# EAGLE board TeensyBalanceBoardWorking (EAGLE 7.7.0)
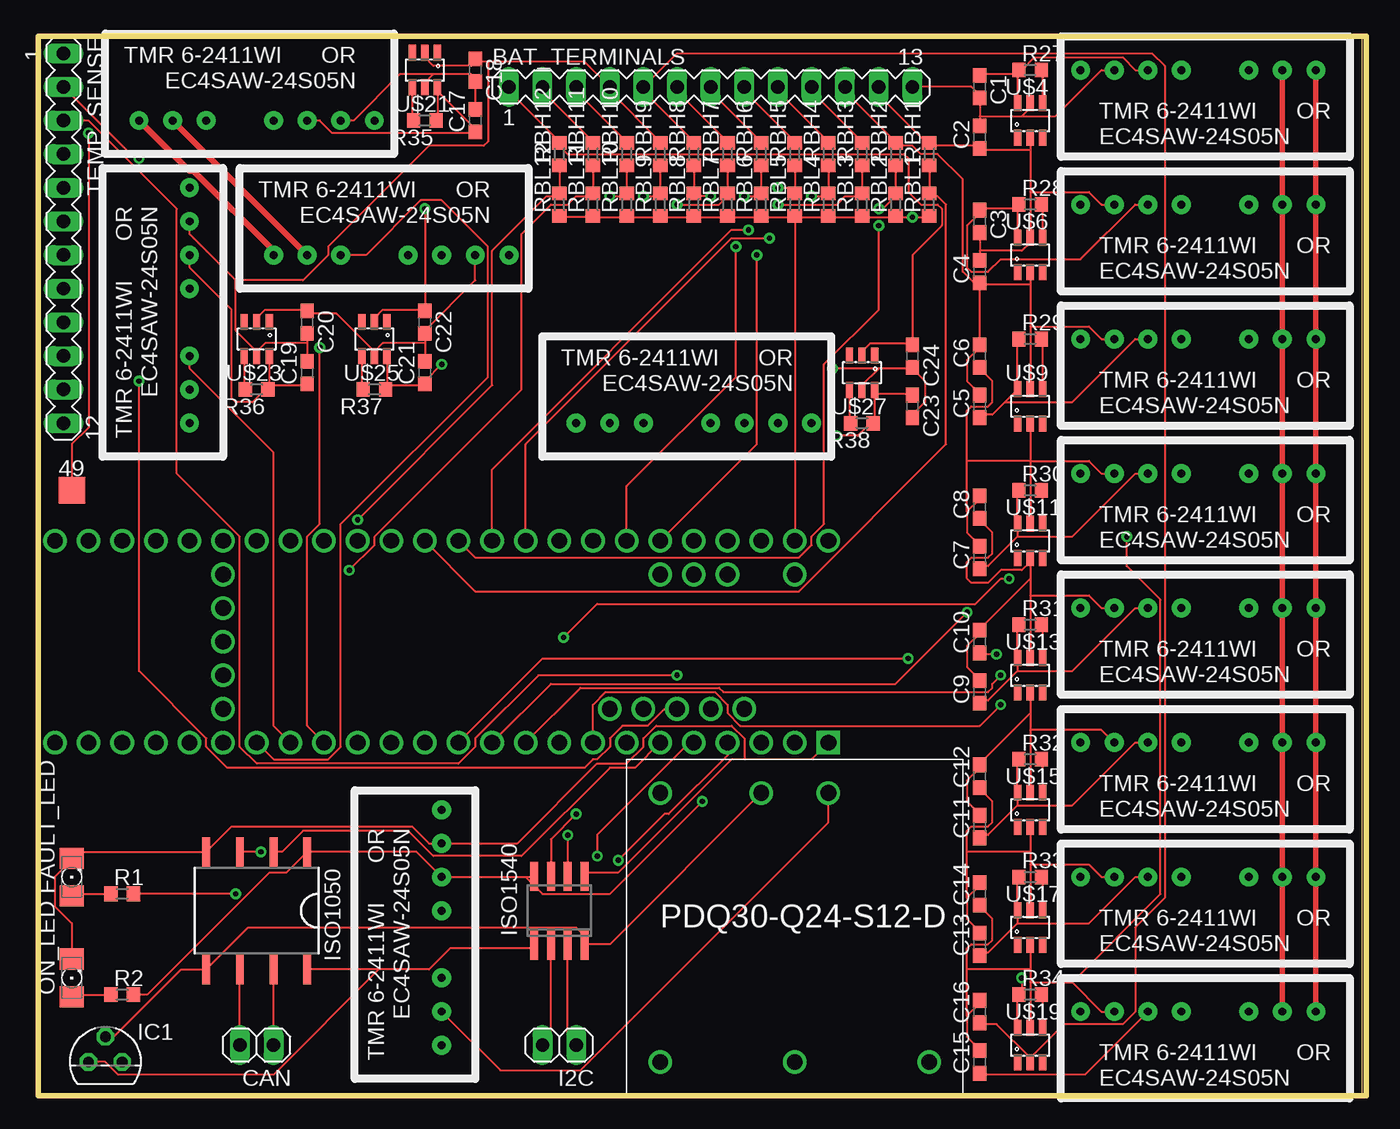
[diagram p0: board, top side]
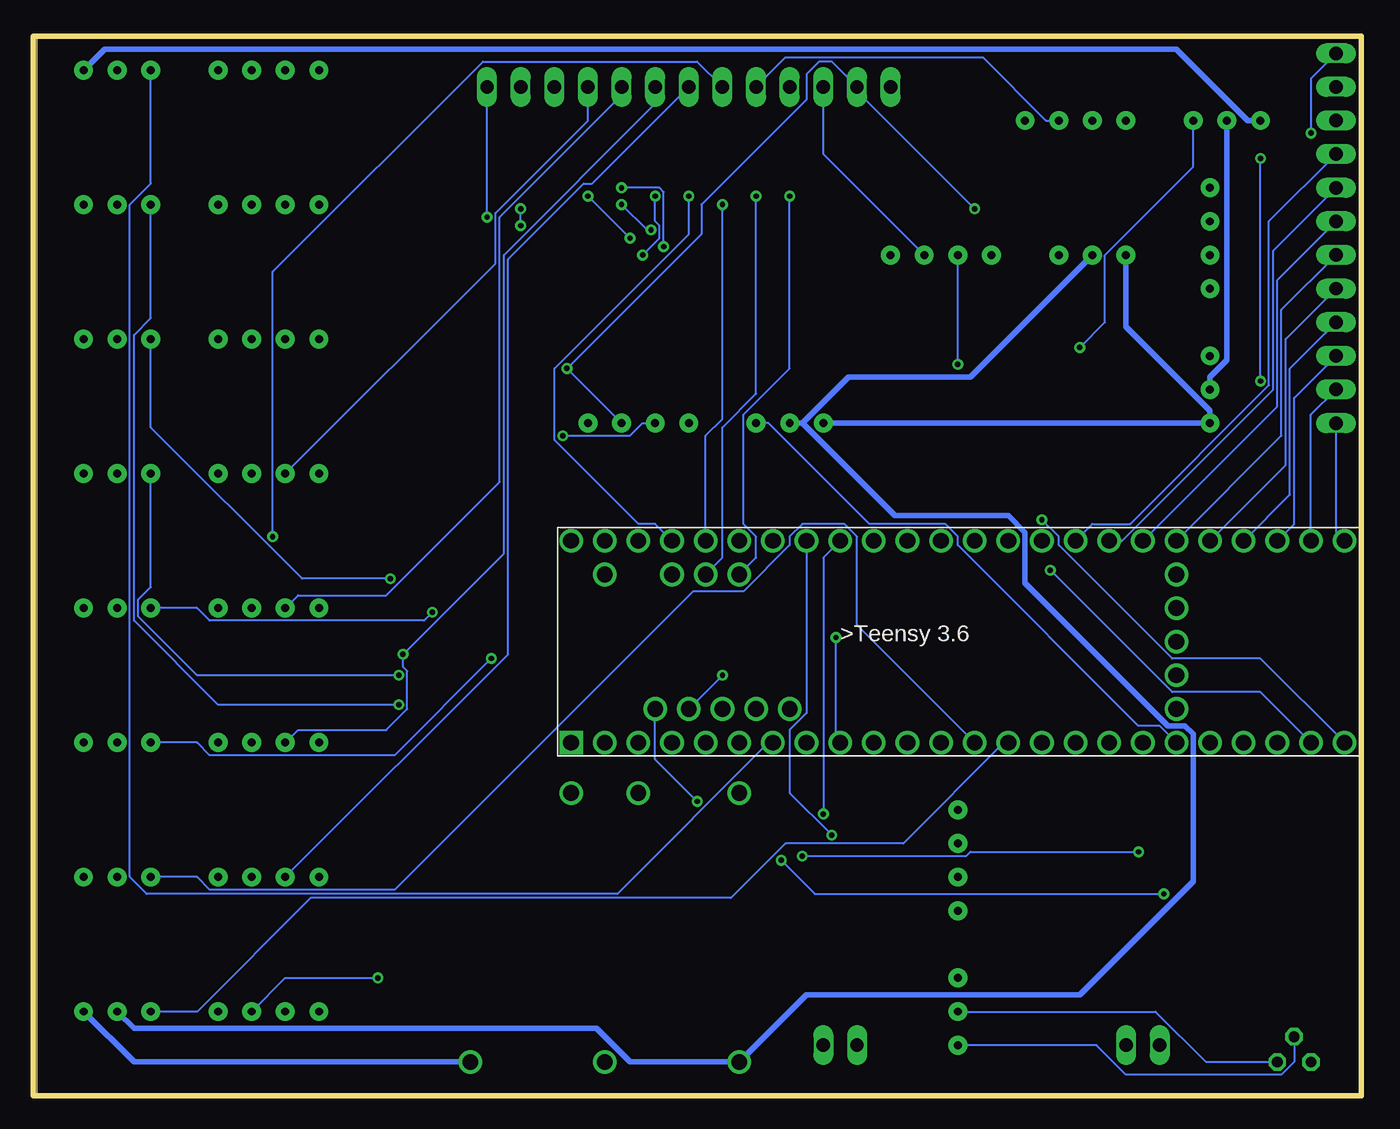
[diagram p1: board, bottom side, seen from below]

Size 100.33 x 80.01 mm. Coordinates in mm from the lower left corner, seen from the top.
Outline: 0,0 100,0 100,80 0,80 0,43.18
Outline: 0,43.18 0,0
Outline: 0,0 100.33,0 100.33,80.01 0,80.01 0,43.18
Copper layers (1*16): Top 0.035mm / dielectric 1.5mm / Bottom 0.035mm
Design rules "default *": minimum track width 6mil, minimum drill 16mil, track to track 6mil, track to pad 6mil, pad to pad 6mil, via to via 6mil, smd to smd 6mil, copper to edge 20mil, drill to drill 6mil, minimum pad ring 10mil, minimum via ring 8mil, stop-mask expansion 4mil, vias tented up to drill 0mil, thermal gap 10mil
Net classes: 1 Power: width 0.406 mm

## Footprints (pad centres in the part's own frame; a part is rotated, then mirrored left to right if it is on the bottom)
TP20SQ = smd 2 x 2: TP 0,0
MA13-1 = drill 1.016 long: 1 -15.24,0; 2 -12.7,0; 3 -10.16,0; 4 -7.62,0; 5 -5.08,0; 6 -2.54,0; 7 0,0; 8 2.54,0; 9 5.08,0; 10 7.62,0; 11 10.16,0; 12 12.7,0; 13 15.24,0
C0603 = smd 1.1 x 1: 1 -0.85,0; 2 0.85,0
1X02 = drill 1.016 long: 1 -1.27,0; 2 1.27,0
1206 = smd 1.6 x 1.803: A -1.422,0; C 1.422,0
TO92 = drill 0.813 octagon: 1 -1.27,0; 2 0,1.905; 3 1.27,0
DUB-R-PDSO-G8 = smd 0.6 x 2.2: 1 -3.81,-4.445; 2 -1.27,-4.445; 3 1.27,-4.445; 4 3.81,-4.445; 5 3.81,4.445; 6 1.27,4.445; 7 -1.27,4.445; 8 -3.81,4.445
SO-08 = smd 0.6 x 2.2: 1 -1.905,-2.6; 2 -0.635,-2.6; 3 0.635,-2.6; 4 1.905,-2.6; 5 1.905,2.6; 6 0.635,2.6; 7 -0.635,2.6; 8 -1.905,2.6
R0603 = smd 1 x 1.1: 1 -0.85,0; 2 0.85,0
MA12-1 = drill 1.016 long: 1 -13.97,0; 2 -11.43,0; 3 -8.89,0; 4 -6.35,0; 5 -3.81,0; 6 -1.27,0; 7 1.27,0; 8 3.81,0; 9 6.35,0; 10 8.89,0; 11 11.43,0; 12 13.97,0
TEENSY3.6 = drill 1.19: 0 2.54,-15.24; 1 5.08,-15.24; 2 7.62,-15.24; 3 10.16,-15.24; 3.3V 35.56,-15.24; 3.3V(250MAMAX) 5.08,0; 4 12.7,-15.24; 5 15.24,-15.24; 5V 6.35,-12.7; 6 17.78,-15.24; 7 20.32,-15.24; 8 22.86,-15.24; 9 25.4,-15.24; 10 27.94,-15.24; 11 30.48,-15.24; 12 33.02,-15.24; 13 33.02,0; 14 30.48,0; 15 27.94,0; 16 25.4,0; 17 22.86,0; 18 20.32,0; 19 17.78,0; 20 15.24,0; 21 12.7,0; 22 10.16,0; 23 7.62,0; 24 38.1,-15.24; 25 40.64,-15.24; 26 43.18,-15.24; 27 45.72,-15.24; 28 48.26,-15.24; 29 50.8,-15.24; 30 53.34,-15.24; 31 55.88,-15.24; 32 58.42,-15.24; 33 58.42,0; 34 55.88,0; 35 53.34,0; 36 50.8,0; 37 48.26,0; 38 45.72,0; 39 43.18,0; A10 10.16,-2.54; A11 12.7,-2.54; A21 40.64,0; A22 38.1,0; ANALOG-GND 2.54,0; AREF 7.62,-2.54; DM 8.89,-12.7; DP 11.43,-12.7; GND' 35.56,0; GND'' 13.97,-12.7; GND''' 16.51,-12.7; P$30 45.72,-12.7; P$31 45.72,-10.16; P$32 45.72,-7.62; P$33 45.72,-5.08; P$34 45.72,-2.54; VIN 0,0; VUSB 2.54,-2.54 | drill 1.19 square: GND 0,-15.24
EC4SAW-24S05N = drill 0.6 pad 1.422: 1 2.54,2.54; 2 5.08,2.54; 3 7.62,2.54; 4 12.7,2.54; 5 15.24,2.54; 6 17.78,2.54; 7 20.32,2.54
SOT23-6 = smd 0.55 x 1.2: 1 -0.95,-1.3; 2 0,-1.3; 3 0.95,-1.3; 4 0.95,1.3; 5 0,1.3; 6 -0.95,1.3
PDQ30-Q24-S12-D = drill 1.19: 1 15.24,22.86; 2 10.16,22.86; 3 22.86,2.54; 4 12.7,2.54; 5 2.54,2.54; 6 2.54,22.86

## Placement (x,y rotation side)
49  TPTP20SQ  [TP20SQ]  2.54,45.72 0 top
BAT_TERMINALS  [MA13-1]  50.8,76.2 0 top
C1  2.2uF  [C0603]  71.12,76.2 270 top
C2  2.2uF  [C0603]  71.12,72.39 90 top
C3  2.2uF  [C0603]  71.12,66.04 270 top
C4  2.2uF  [C0603]  71.12,62.23 90 top
C5  2.2uF  [C0603]  71.12,52.07 90 top
C6  2.2uF  [C0603]  71.12,55.88 90 top
C7  2.2uF  [C0603]  71.12,40.64 90 top
C8  2.2uF  [C0603]  71.12,44.45 90 top
C9  2.2uF  [C0603]  71.12,30.48 90 top
C10  2.2uF  [C0603]  71.12,34.29 90 top
C11  2.2uF  [C0603]  71.12,20.32 90 top
C12  2.2uF  [C0603]  71.12,24.13 90 top
C13  2.2uF  [C0603]  71.12,11.43 90 top
C14  2.2uF  [C0603]  71.12,15.24 90 top
C15  2.2uF  [C0603]  71.12,2.54 90 top
C16  2.2uF  [C0603]  71.12,6.35 90 top
C17  2.2uF  [C0603]  33.02,73.66 90 top
C18  2.2uF  [C0603]  33.02,77.47 270 top
C19  2.2uF  [C0603]  20.32,54.61 90 top
C20  2.2uF  [C0603]  20.32,58.42 270 top
C21  2.2uF  [C0603]  29.21,54.61 90 top
C22  2.2uF  [C0603]  29.21,58.42 270 top
C23  2.2uF  [C0603]  66.04,52.07 270 top
C24  2.2uF  [C0603]  66.04,55.88 270 top
CAN  [1X02]  16.51,3.81 180 top
FAULT_LED  [1206]  2.54,16.51 90 top
I2C  [1X02]  39.37,3.81 180 top
IC1  7805L  [TO92]  5.08,2.54 0 top
ISO1050  ISO1050DUB  [DUB-R-PDSO-G8]  16.51,13.97 180 top
ISO1540  ISO7220A  [SO-08]  39.37,13.97 0 top
ON_LED  [1206]  2.54,8.89 90 top
R1  330  [R0603]  6.35,15.24 0 top
R2  470  [R0603]  6.35,7.62 0 top
R27  470  [R0603]  74.93,77.47 0 top
R28  470  [R0603]  74.93,67.31 0 top
R29  470  [R0603]  74.93,57.15 0 top
R30  470  [R0603]  74.93,45.72 0 top
R31  470  [R0603]  74.93,35.56 0 top
R32  470  [R0603]  74.93,25.4 0 top
R33  470  [R0603]  74.93,16.51 0 top
R34  470  [R0603]  74.93,7.62 0 top
R35  470  [R0603]  29.21,73.66 180 top
R36  470  [R0603]  16.51,53.34 180 top
R37  470  [R0603]  25.4,53.34 180 top
R38  470  [R0603]  62.23,50.8 180 top
RBH1  [R0603]  67.31,71.12 90 top
RBH2  [R0603]  64.77,71.12 90 top
RBH3  [R0603]  62.23,71.12 90 top
RBH4  [R0603]  59.69,71.12 90 top
RBH5  [R0603]  57.15,71.12 90 top
RBH6  [R0603]  54.61,71.12 90 top
RBH7  [R0603]  52.07,71.12 90 top
RBH8  [R0603]  49.53,71.12 90 top
RBH9  [R0603]  46.99,71.12 90 top
RBH10  [R0603]  44.45,71.12 90 top
RBH11  [R0603]  41.91,71.12 90 top
RBH12  [R0603]  39.37,71.12 90 top
RBL1  [R0603]  67.31,67.31 90 top
RBL2  [R0603]  64.77,67.31 90 top
RBL3  [R0603]  62.23,67.31 90 top
RBL4  [R0603]  59.69,67.31 90 top
RBL5  [R0603]  57.15,67.31 90 top
RBL6  [R0603]  54.61,67.31 90 top
RBL7  [R0603]  52.07,67.31 90 top
RBL8  [R0603]  49.53,67.31 90 top
RBL9  [R0603]  46.99,67.31 90 top
RBL10  [R0603]  44.45,67.31 90 top
RBL11  [R0603]  41.91,67.31 90 top
RBL12  [R0603]  39.37,67.31 90 top
TEMP_SENSE  [MA12-1]  1.91,64.77 270 top
U$1  TEENSY3.6  [TEENSY3.6]  59.69,41.91 0 bottom
U$2  EC4SAW-24S05N6-2411WI  [EC4SAW-24S05N]  99.06,80.01 180 top
U$3  EC4SAW-24S05N6-2411WI  [EC4SAW-24S05N]  33.02,1.27 90 top
U$4  10F200T  [SOT23-6]  74.93,73.66 0 top
U$5  EC4SAW-24S05N6-2411WI  [EC4SAW-24S05N]  99.06,69.85 180 top
U$6  10F200T  [SOT23-6]  74.93,63.5 0 top
U$7  EC4SAW-24S05N6-2411WI  [EC4SAW-24S05N]  99.06,59.69 180 top
U$8  PDQ30-Q24-S12-D  [PDQ30-Q24-S12-D]  44.45,0 0 top
U$9  10F200T  [SOT23-6]  74.93,52.07 0 top
U$10  EC4SAW-24S05N6-2411WI  [EC4SAW-24S05N]  99.06,49.53 180 top
U$11  10F200T  [SOT23-6]  74.93,41.91 0 top
U$12  EC4SAW-24S05N6-2411WI  [EC4SAW-24S05N]  99.06,39.37 180 top
U$13  10F200T  [SOT23-6]  74.93,31.75 0 top
U$14  EC4SAW-24S05N6-2411WI  [EC4SAW-24S05N]  99.06,29.21 180 top
U$15  10F200T  [SOT23-6]  74.93,21.59 0 top
U$16  EC4SAW-24S05N6-2411WI  [EC4SAW-24S05N]  99.06,19.05 180 top
U$17  10F200T  [SOT23-6]  74.93,12.7 0 top
U$18  EC4SAW-24S05N6-2411WI  [EC4SAW-24S05N]  99.06,8.89 180 top
U$19  10F200T  [SOT23-6]  74.93,3.81 0 top
U$20  EC4SAW-24S05N6-2411WI  [EC4SAW-24S05N]  5.08,71.12 0 top
U$21  10F200T  [SOT23-6]  29.21,77.47 180 top
U$22  EC4SAW-24S05N6-2411WI  [EC4SAW-24S05N]  13.97,48.26 90 top
U$23  10F200T  [SOT23-6]  16.51,57.15 180 top
U$24  EC4SAW-24S05N6-2411WI  [EC4SAW-24S05N]  15.24,60.96 0 top
U$25  10F200T  [SOT23-6]  25.4,57.15 180 top
U$26  EC4SAW-24S05N6-2411WI  [EC4SAW-24S05N]  38.1,48.26 0 top
U$27  10F200T  [SOT23-6]  62.23,54.61 180 top

## Library data of the parts
49 = testpad
BAT_TERMINALS TEMP_SENSE = con-lstb; OC_FARNELL: unknown; OC_NEWARK: unknown
C1-C24 U$4 U$6 U$9 U$11 U$13 U$15 U$17 U$19 U$21 U$23 U$25 U$27 = adafruit
CAN I2C = pinhead
FAULT_LED ON_LED = led
IC1 = linear
ISO1050 = texas; MPN: ISO1050DUBR; OC_FARNELL: 1755712; OC_NEWARK: 14R9899
ISO1540 = texas; MPN: ISO7220AD; OC_FARNELL: 1390649; OC_NEWARK: 48M0666
R1 R2 R27-R38 RBH1-RBH12 RBL1-RBL12 = eagle-ltspice; SPICEMODEL: NONE; SPICEPREFIX: R
U$1-U$3 U$5 U$7 U$8 U$10 U$12 U$14 U$16 U$18 U$20 U$22 U$24 U$26 = Teensy36

## Nets
5V: ISO1050.1 ISO1540.8 R2.2 U$1.5V U$3.5
AGND: BAT_TERMINALS.13 C1.2 C2.2 RBL1.1 RBL2.1 RBL3.1 RBL4.1 RBL5.1 RBL6.1 RBL7.1 RBL8.1 RBL9.1 RBL10.1 RBL11.1 RBL12.1 U$1.ANALOG-GND U$2.6 U$4.5
B1: BAT_TERMINALS.12 C2.1 C3.2 C4.2 RBH1.2 U$4.2 U$5.6 U$6.5
B2: BAT_TERMINALS.11 C4.1 C5.2 C6.2 RBH2.2 U$6.2 U$7.6 U$9.5
B3: BAT_TERMINALS.10 C6.1 C7.2 C8.2 RBH3.2 U$9.2 U$10.6 U$11.5
B4: BAT_TERMINALS.9 C8.1 C9.2 C10.2 RBH4.2 U$11.2 U$12.6 U$13.5
B5: BAT_TERMINALS.8 C10.1 C11.2 C12.2 RBH5.2 U$13.2 U$14.6 U$15.5
B6: BAT_TERMINALS.7 C12.1 C13.2 C14.2 RBH6.2 U$15.2 U$16.6 U$17.5
B7: BAT_TERMINALS.6 C14.1 C15.2 C16.2 RBH7.2 U$17.2 U$18.6 U$19.5
B8: BAT_TERMINALS.5 C16.1 C17.2 C18.2 RBH8.2 U$19.2 U$20.6 U$21.5
B9: BAT_TERMINALS.4 C18.1 C19.2 C20.2 RBH9.2 U$21.2 U$22.6 U$23.5
B10: BAT_TERMINALS.3 C20.1 C21.2 C22.2 RBH10.2 U$23.2 U$24.6 U$25.5
B11: BAT_TERMINALS.2 C22.1 C23.2 C24.2 RBH11.2 U$25.2 U$26.6 U$27.5
B12: BAT_TERMINALS.1 C24.1 RBH12.2 U$27.2
C1: U$1.5 U$2.3
C2: U$1.6 U$5.3
C3: U$1.7 U$7.3
C4: U$1.8 U$10.3
C5: U$1.9 U$12.3
C6: U$1.10 U$14.3
C7: U$1.11 U$16.3
C8: U$1.12 U$18.3
C9: U$1.24 U$20.3
C10: U$1.25 U$22.3
C11: U$1.26 U$24.3
C12: U$1.27 U$26.3
CAN_HIGH: CAN.1 ISO1050.7
CAN_LOW: CAN.2 ISO1050.6
CHARGE+ [Power]: U$2.1 U$5.1 U$7.1 U$8.3 U$10.1 U$12.1 U$14.1 U$16.1 U$18.1 U$20.1 U$22.1 U$24.1 U$26.1
CHARGE- [Power]: U$2.2 U$5.2 U$7.2 U$8.5 U$10.2 U$12.2 U$14.2 U$16.2 U$18.2 U$20.2 U$22.2 U$24.2 U$26.2
FAULT: R1.2 U$1.2
GLV_5V: IC1.1 ISO1050.8 ISO1540.1
GLV_12V: IC1.3 U$3.2 U$8.1
GLV_GND: IC1.2 ISO1050.5 ISO1540.4 U$3.1 U$8.2
GND: FAULT_LED.C ISO1050.4 ISO1540.5 ON_LED.C U$1.GND U$3.6
N$1: C1.1 R27.1 U$2.5 U$4.6
N$2: U$1.3.3V(250MAMAX)
N$3: ISO1050.3 U$1.3
N$4: ISO1050.2 U$1.4
N$5: C3.1 R28.1 U$5.5 U$6.6
N$6: ON_LED.A R2.1
N$7: FAULT_LED.A R1.1
N$8: R27.2 U$4.4
N$9: R28.2 U$6.4
N$10: C5.1 R29.1 U$7.5 U$9.6
N$11: R29.2 U$9.4
N$12: C7.1 R30.1 U$10.5 U$11.6
N$13: R30.2 U$11.4
N$14: C9.1 R31.1 U$12.5 U$13.6
N$15: R31.2 U$13.4
N$16: C11.1 R32.1 U$14.5 U$15.6
N$17: R32.2 U$15.4
N$18: C13.1 R33.1 U$16.5 U$17.6
N$19: R33.2 U$17.4
N$20: C15.1 R34.1 U$18.5 U$19.6
N$21: R34.2 U$19.4
N$22: C17.1 R35.1 U$20.5 U$21.6
N$23: R35.2 U$21.4
N$24: C19.1 R36.1 U$22.5 U$23.6
N$25: R36.2 U$23.4
N$26: C21.1 R37.1 U$24.5 U$25.6
N$27: R37.2 U$25.4
N$28: C23.1 R38.1 U$26.5 U$27.6
N$29: R38.2 U$27.4
SCL: ISO1540.6 U$1.19
SCL_GLV: I2C.1 ISO1540.3
SDA: ISO1540.7 U$1.18
SDA_GLV: I2C.2 ISO1540.2
TS1: TEMP_SENSE.12 U$1.33
TS2: TEMP_SENSE.11 U$1.34
TS3: TEMP_SENSE.10 U$1.35
TS4: TEMP_SENSE.9 U$1.36
TS5: TEMP_SENSE.8 U$1.37
TS6: TEMP_SENSE.7 U$1.38
TS7: TEMP_SENSE.6 U$1.39
TS8: TEMP_SENSE.5 U$1.A21
TS9: TEMP_SENSE.4 U$1.A22
TS10: TEMP_SENSE.3 U$1.DM
TS11: TEMP_SENSE.2 U$1.DP
TS12: 49.TP TEMP_SENSE.1
VS1: RBH1.1 RBL1.2 U$1.14
VS2: RBH2.1 RBL2.2 U$1.15
VS3: RBH3.1 RBL3.2 U$1.16
VS4: RBH4.1 RBL4.2 U$1.17
VS5: RBH5.1 RBL5.2 U$1.20
VS6: RBH6.1 RBL6.2 U$1.21
VS7: RBH7.1 RBL7.2 U$1.22
VS8: RBH8.1 RBL8.2 U$1.23
VS9: RBH9.1 RBL9.2 U$1.A10
VS10: RBH10.1 RBL10.2 U$1.A11
VS11: RBH11.1 RBL11.2 U$1.31
VS12: RBH12.1 RBL12.2 U$1.32

## Tracks (layer width: path | path; a pad name or v marks a point on that pad's centre or on a via)
5V  (via drill 0.41)
  Top 0.152: R2.2 8.26,7.62 17.46,16.83 18.73,16.83 ISO1050.1 28.57,18.41 U$3.5 36.83,16.51 | 36.83,16.51 37.47,16.51 ISO1540.8 | v50.16,22.23 43.18,15.24 38.1,15.24 36.83,16.51
  Bottom 0.152: U$1.5V 53.34,25.4 v50.16,22.23
AGND  (via drill 0.41)
  Top 0.152: 71.12,73.98 C1.2 71.12,75.56 70.48,76.2 BAT_TERMINALS.13 | 71.12,73.98 C2.2 | U$4.5 74.93,74.61 74.3,73.98 | 71.12,73.98 74.3,73.98 | U$2.6 80.33,77.47 76.83,73.98 74.3,73.98 | 41.91,66.36 39.37,66.36 RBL12.1 | 41.91,66.36 44.45,66.36 | 41.91,66.36 RBL11.1 | 44.45,66.36 46.99,66.36 | 44.45,66.36 RBL10.1 | 46.99,66.36 49.53,66.36 | 46.99,66.36 RBL9.1 | 49.53,66.36 52.07,66.36 | 49.53,66.36 RBL8.1 | 52.07,66.36 54.61,66.36 | 52.07,66.36 RBL7.1 | 54.61,66.36 57.15,66.36 | 54.61,66.36 RBL6.1 | 57.15,66.36 59.69,66.36 | 59.69,66.36 62.23,66.36 | 59.69,66.36 RBL4.1 | 62.23,66.36 64.77,66.36 | 62.23,66.36 RBL3.1 | 64.77,66.36 v66.04,66.36 67.31,66.36 RBL1.1 | 64.77,66.36 RBL2.1 | 57.15,66.36 U$1.ANALOG-GND | 57.15,66.36 RBL5.1
  Bottom 0.152: v66.04,66.36 BAT_TERMINALS.13
B1
  Top 0.152: 67.31,71.75 71.12,71.75 C2.1 71.12,71.44 74.93,71.44 | C3.2 71.12,63.82 | 71.12,63.82 C4.2 | U$4.2 74.93,71.44 | 74.93,71.44 74.93,68.26 | 74.93,68.26 U$6.5 74.93,64.45 74.3,63.82 71.12,63.82 | U$5.6 80.33,67.31 79.38,68.26 74.93,68.26 | BAT_TERMINALS.12 63.5,75.56 67.31,71.75 | 67.31,71.75 RBH1.2
B2
  Top 0.152: BAT_TERMINALS.11 60.96,75.88 64.77,72.07 RBH2.2 64.77,71.75 66.04,71.75 66.67,71.12 67.94,71.12 69.85,69.22 69.85,62.23 71.12,60.96 | C5.2 71.12,53.02 70.17,53.98 70.17,55.56 71.12,56.52 C6.2 71.12,60.96 | 71.12,60.96 71.12,61.28 | U$6.2 74.93,61.28 | 74.93,61.28 74.93,58.1 | 74.93,58.1 U$9.5 | U$7.6 80.33,57.15 79.38,58.1 74.93,58.1 | 74.93,61.28 71.12,61.28 | 71.12,61.28 C4.1 71.12,61.28
B3
  Top 0.152: 70.17,44.13 70.17,42.55 71.12,41.59 C7.2 | 70.17,44.13 71.12,45.09 C8.2 | 70.17,44.13 70.17,47.94 | 70.17,47.94 70.17,51.75 70.48,52.07 71.75,52.07 72.07,52.39 72.07,53.98 71.12,54.93 C6.1 | BAT_TERMINALS.10 58.42,75.88 62.23,72.07 RBH3.2 | U$9.2 74.93,47.94 | 74.93,47.94 U$11.5 | U$10.6 80.33,46.99 79.38,47.94 74.93,47.94 | 74.93,47.94 70.17,47.94
  Bottom 0.152: BAT_TERMINALS.10 58.42,73.66 65.41,66.67 65.41,62.87 U$10.6
B4
  Top 0.152: BAT_TERMINALS.9 55.88,75.88 59.69,72.07 RBH4.2 | C9.2 71.12,31.43 70.17,32.38 70.17,33.97 71.12,34.92 C10.2 71.12,35.24 74.93,39.05 | 74.93,40.32 74.3,39.69 72.71,39.69 71.75,38.73 70.48,38.73 70.17,39.05 70.17,40.32 70.48,40.64 71.75,40.64 72.07,40.96 72.07,42.55 71.12,43.5 C8.1 | 74.93,40.32 74.93,39.05 | 74.93,39.05 74.93,37.78 | 74.93,37.78 U$13.5 | 74.93,40.32 U$11.2 | U$12.6 80.33,36.83 79.38,37.78 74.93,37.78
  Bottom 0.152: BAT_TERMINALS.9 55.88,75.56 65.09,66.36 65.09,46.35 73.66,37.78 80.33,37.78 U$12.6
B5  (via drill 0.41)
  Top 0.152: C11.2 71.12,21.27 70.17,22.23 70.17,23.81 71.12,24.77 C12.2 71.12,25.08 74.93,28.89 | U$13.2 74.93,28.89 | 74.93,28.89 74.93,27.62 | 74.93,27.62 U$15.5 | BAT_TERMINALS.8 53.34,75.88 57.15,72.07 RBH5.2 | v72.39,33.34 71.12,33.34 C10.1 | 74.93,27.62 80.33,27.62 U$14.6
  Bottom 0.152: U$14.6 80.33,27.62 73.66,27.62 72.07,29.21 72.07,32.07 72.39,32.38 v72.39,33.34 64.77,40.96 64.77,63.5 53.34,74.93 BAT_TERMINALS.8
B6
  Top 0.152: 70.17,14.92 70.17,13.34 71.12,12.38 C13.2 | 70.17,14.92 71.12,15.88 C14.2 | 70.17,14.92 70.17,18.41 | 70.17,18.41 70.17,20 70.48,20.32 71.75,20.32 72.07,20.64 72.07,22.23 71.12,23.18 C12.1 | BAT_TERMINALS.7 50.8,75.88 54.61,72.07 RBH6.2 | U$15.2 74.93,18.41 | 74.93,18.41 74.93,17.46 | 74.93,17.46 U$17.5 | U$16.6 80.33,16.51 79.38,17.46 74.93,17.46 | 74.93,18.41 70.17,18.41
  Bottom 0.152: BAT_TERMINALS.7 58.1,68.9 58.74,68.9 64.45,63.18 64.45,33.34 U$16.6
B7  (via drill 0.41)
  Top 0.152: 70.17,6.03 70.17,4.45 71.12,3.49 C15.2 | 70.17,6.03 71.12,6.99 C16.2 | 70.17,6.03 70.17,9.53 | 70.17,9.53 70.17,11.11 70.48,11.43 71.75,11.43 72.07,11.75 72.07,13.34 71.12,14.29 C14.1 | BAT_TERMINALS.6 48.26,75.88 52.07,72.07 RBH7.2 | U$17.2 74.93,9.53 | 74.93,9.53 74.93,8.57 | 74.93,8.57 U$19.5 | U$18.6 80.33,6.35 78.11,8.57 | 74.93,8.57 78.11,8.57 | v82.23,42.23 82.23,40.01 84.77,37.47 84.77,15.24 78.11,8.57 | 74.93,9.53 70.17,9.53
  Bottom 0.152: BAT_TERMINALS.6 50.16,78.11 66.36,78.11 82.23,62.23 v82.23,42.23
B8
  Top 0.152: C17.2 C18.2 33.02,76.83 32.7,77.15 29.84,77.15 | U$21.5 29.21,76.52 29.84,77.15 | U$20.6 23.81,73.66 27.3,77.15 29.84,77.15 | 74.93,2.86 72.39,5.4 71.12,5.4 C16.1 | 74.93,2.86 U$19.2 74.93,2.54 | RBH8.2 49.53,72.07 45.72,75.88 BAT_TERMINALS.5 48.26,78.74 84.14,78.74 85.09,77.79 85.09,14.92 82.87,12.7 82.87,6.35 81.92,5.4 77.47,5.4 74.93,2.86
  Bottom 0.152: U$20.6 23.81,73.66 28.57,78.42 43.5,78.42 BAT_TERMINALS.5
B9
  Top 0.152: C20.2 20.32,56.83 | 20.32,56.83 C19.2 | 16.51,56.2 U$23.5 16.51,55.88 | 16.51,56.2 17.14,56.83 20.32,56.83 | U$22.6 11.43,65.09 14.92,61.59 | 14.92,61.59 14.92,57.78 16.51,56.2 | RBH9.2 46.99,72.07 43.18,75.88 BAT_TERMINALS.4 41.27,78.11 33.97,78.11 | 33.97,78.11 33.02,78.11 | U$21.2 29.21,78.42 29.84,77.79 32.7,77.79 33.02,78.11 | 33.02,78.11 C18.1 | 14.92,61.59 20,61.59 21.91,63.5 21.91,64.14 29.53,71.75 33.66,71.75 33.97,72.07 33.97,78.11
B10
  Top 0.152: BAT_TERMINALS.3 40.64,75.88 44.45,72.07 RBH10.2 | U$23.2 16.51,58.74 17.14,59.37 20.32,59.37 C20.1 20.32,59.05 22.54,59.05 25.4,56.2 | 29.21,56.83 C22.2 29.21,57.78 33.02,61.59 U$24.6 | 29.21,56.83 C21.2 | 25.4,56.2 U$25.5 25.4,55.88 | 25.4,56.2 26.04,56.83 29.21,56.83
  Bottom 0.152: BAT_TERMINALS.3 40.64,71.12 U$24.6
B11  (via drill 0.41)
  Top 0.152: 66.04,54.93 66.99,53.98 66.99,52.39 66.04,51.44 C23.2 | U$27.5 62.23,53.66 63.5,54.93 | 66.04,54.93 63.5,54.93 | 66.04,54.93 C24.2 | 63.5,54.93 v60.01,54.93 | 29.21,59.37 26.04,59.37 25.4,58.74 U$25.2 | BAT_TERMINALS.2 38.1,75.88 41.91,72.07 RBH11.2 | v29.21,66.99 29.21,59.37 | 29.21,59.37 C22.1
  Bottom 0.152: U$26.6 v60.01,54.93 49.85,65.09 49.85,67.31 41.91,75.25 41.91,77.15 40.96,78.11 40.01,78.11 BAT_TERMINALS.2 38.1,75.88 v29.21,66.99
B12
  Top 0.152: 66.04,56.83 62.87,56.83 62.23,56.2 U$27.2 | BAT_TERMINALS.1 35.56,75.88 39.37,72.07 RBH12.2 39.37,71.75 40.01,71.12 65.41,71.12 65.72,70.8 65.72,68.26 66.67,67.31 67.94,67.31 68.26,66.99 68.26,65.72 66.04,63.5 66.04,56.83 | 66.04,56.83 C24.1
C1
  Bottom 0.152: U$2.3 91.44,68.9 93.03,67.31 93.03,16.51 91.76,15.24 56.2,15.24 44.77,26.67 U$1.5
C2  (via drill 0.41)
  Top 0.152: v72.71,29.53 71.12,27.94 53.02,27.94 52.07,28.89 52.07,29.53 51.12,30.48 42.86,30.48 41.91,29.53 U$1.6
  Bottom 0.152: U$5.3 91.44,58.74 92.71,57.47 92.71,35.88 86.36,29.53 v72.71,29.53
C3  (via drill 0.41)
  Top 0.152: v73.34,39.05 72.71,39.05 70.8,37.15 42.23,37.15 v39.69,34.61
  Bottom 0.152: U$7.3 91.44,50.48 80.01,39.05 v73.34,39.05 | v39.69,34.61 39.69,26.99 U$1.7
C4  (via drill 0.41)
  Top 0.152: v72.71,31.75 72.07,31.11 72.07,30.8 71.75,30.48 51.75,30.48 51.44,30.8 40.96,30.8 U$1.8
  Bottom 0.152: U$10.3 91.44,38.42 92.39,37.47 92.39,36.2 87.95,31.75 v72.71,31.75
C5  (via drill 0.41)
  Top 0.152: v70.17,36.51 64.77,31.11 38.73,31.11 U$1.9
  Bottom 0.152: U$12.3 87.95,36.83 87,35.88 70.8,35.88 v70.17,36.51
C6  (via drill 0.41)
  Top 0.152: v65.72,33.02 38.1,33.02 U$1.10
  Bottom 0.152: U$14.3 87.95,26.67 87,25.72 73.03,25.72 v65.72,33.02
C7
  Bottom 0.152: U$16.3 87.95,16.51 87,15.56 73.03,15.56 50.48,38.1 46.67,38.1 43.18,41.59 43.18,42.23 42.23,43.18 39.05,43.18 38.1,42.23 38.1,35.56 U$1.11
C8
  Bottom 0.152: U$18.3 87.95,6.35 79.38,14.92 47.62,14.92 43.5,19.05 34.61,19.05 26.99,26.67 U$1.12
C9  (via drill 0.41)
  Top 0.152: v21.27,56.52 21.27,43.18 20.32,42.23 20.32,27.94 U$1.24
  Bottom 0.152: U$20.3 12.7,70.17 19.37,63.5 19.37,58.42 v21.27,56.52
C10
  Top 0.152: U$22.3 11.43,54.93 17.78,48.58 17.78,27.94 U$1.25
C11
  Top 0.152: U$24.3 24.77,63.5 28.89,67.63 30.48,67.63 33.97,64.14 33.97,54.29 22.86,43.18 22.86,26.35 21.91,25.4 17.78,25.4 U$1.26
C12
  Bottom 0.152: U$26.3 44.77,50.8 37.15,43.18 31.43,43.18 30.48,42.23 30.48,41.59 16.83,27.94 15.24,27.94 U$1.27
CAN_HIGH
  Top 0.152: CAN.1 ISO1050.7
CAN_LOW
  Top 0.152: CAN.2 ISO1050.6
CHARGE+
  Top 0.406: U$20.1 11.43,69.85 11.75,69.85 17.78,63.82 U$24.1 | U$2.1 U$5.1 U$7.1 U$10.1 U$12.1 U$14.1 U$16.1 U$18.1
  Bottom 0.406: U$24.1 17.78,58.1 11.43,51.75 U$22.1 U$26.1 | U$8.3 92.71,2.54 U$18.1 | U$20.1 8.57,73.66 13.97,79.06 94.93,79.06 U$2.1
CHARGE-
  Top 0.406: U$20.2 U$24.2 | U$2.2 U$5.2 U$7.2 U$10.2 U$12.2 U$14.2 U$16.2 U$18.2
  Bottom 0.406: U$22.2 11.43,54.29 10.16,55.56 U$20.2 | 42.23,50.8 U$26.2 | 42.23,50.8 38.73,54.29 29.53,54.29 U$24.2 | U$18.2 92.71,5.08 57.78,5.08 55.24,2.54 U$8.5 41.91,7.62 21.27,7.62 12.7,16.19 12.7,27.3 13.34,27.94 14.61,27.94 25.4,38.73 25.4,42.55 26.67,43.81 35.24,43.81 42.23,50.8
FAULT  (via drill 0.41)
  Top 0.152: v14.92,15.24 R1.2 | v43.81,17.78 47.31,21.27 47.62,21.27 52.07,25.72 U$1.2
  Bottom 0.152: v14.92,15.24 41.27,15.24 v43.81,17.78
GLV_5V
  Top 0.152: 25.72,9.53 29.53,9.53 31.11,11.11 37.47,11.11 ISO1540.1 | 25.72,9.53 ISO1050.8 | IC1.1 5.08,2.54 6.03,1.59 17.78,1.59 25.72,9.53
GLV_12V
  Top 0.152: U$8.1 59.69,20.64 40.96,1.91 34.92,1.91 U$3.2
  Bottom 0.152: IC1.3 11.75,2.54 15.56,6.35 U$3.2
GLV_GND
  Top 0.152: 41.27,11.43 43.18,11.43 U$8.2 | IC1.2 5.71,4.45 10.79,9.53 ISO1050.5 15.88,12.7 40.64,12.7 41.27,12.06 41.27,11.43 | 41.27,11.43 ISO1540.4
  Bottom 0.152: U$3.1 20,3.81 17.78,1.59 6.03,1.59 5.08,2.54 IC1.2
GND
  Top 0.152: 53.34,25.4 58.42,25.4 U$1.GND | 53.34,25.4 52.39,25.4 43.81,16.83 41.27,16.83 ISO1540.5 | ON_LED.C 2.54,13.02 1.27,14.29 1.27,16.51 2.54,17.78 FAULT_LED.C 2.54,18.1 2.86,18.41 ISO1050.4 14.61,20.32 28.26,20.32 29.53,19.05 U$3.6 36.2,19.05 42.23,25.08 44.45,25.08 45.72,26.35 45.72,26.99 46.67,27.94 52.39,27.94 53.34,26.99 53.34,25.4
N$1
  Top 0.152: 73.98,77.47 73.66,77.15 71.12,77.15 C1.1 | 73.98,77.47 73.98,75.25 U$4.6 | 73.98,77.47 R27.1 74.3,77.47 75.25,78.42 81.92,78.42 82.87,77.47 U$2.5
N$3  (via drill 0.41)
  Top 0.152: v16.83,18.41 ISO1050.3 | v42.23,18.1 42.23,19.68 49.21,26.67 U$1.3
  Bottom 0.152: v16.83,18.41 29.53,18.41 29.84,18.1 v42.23,18.1
N$4
  Top 0.152: ISO1050.2 18.41,18.41 20,20 27.94,20 29.84,18.1 36.51,18.1 43.18,24.77 45.09,24.77 U$1.4
N$5
  Top 0.152: 73.98,67.31 73.66,66.99 71.12,66.99 C3.1 71.12,66.67 70.17,65.72 70.17,62.55 70.48,62.23 71.75,62.23 72.71,63.18 78.74,63.18 82.87,67.31 U$5.5 | 73.98,67.31 73.98,65.09 U$6.6 | 73.98,67.31 R28.1
N$6
  Top 0.152: R2.1 2.54,7.62 ON_LED.A
N$7
  Top 0.152: R1.1 2.54,15.24 FAULT_LED.A
N$8
  Top 0.152: R27.2 75.88,77.47 75.88,75.25 U$4.4
N$9
  Top 0.152: R28.2 75.88,67.31 75.88,65.09 U$6.4
N$10
  Top 0.152: 73.03,52.39 73.98,53.34 U$9.6 73.98,53.66 73.98,57.15 R29.1 | 73.03,52.39 72.07,51.44 71.12,51.44 C5.1 | U$7.5 82.87,57.15 78.11,52.39 73.03,52.39
N$11
  Top 0.152: R29.2 75.88,57.15 75.88,53.66 U$9.4
N$12
  Top 0.152: 73.98,42.23 71.75,40.01 71.12,40.01 C7.1 | 73.98,42.23 73.98,43.18 U$11.6 73.98,43.5 73.98,45.72 R30.1 | U$10.5 82.87,46.99 78.11,42.23 73.98,42.23
N$13
  Top 0.152: R30.2 75.88,45.72 75.88,43.5 U$11.4
N$14
  Top 0.152: 73.98,32.07 71.75,29.84 71.12,29.84 C9.1 | 73.98,32.07 73.98,33.02 U$13.6 73.98,33.34 73.98,35.56 R31.1 | U$12.5 82.87,36.83 78.11,32.07 73.98,32.07
N$15
  Top 0.152: R31.2 75.88,35.56 75.88,33.34 U$13.4
N$16
  Top 0.152: 73.98,21.91 71.75,19.68 71.12,19.68 C11.1 | 73.98,21.91 73.98,22.86 U$15.6 73.98,23.18 73.98,25.4 R32.1 | U$14.5 82.87,26.67 78.11,21.91 73.98,21.91
N$17
  Top 0.152: R32.2 75.88,25.4 75.88,23.18 U$15.4
N$18
  Top 0.152: 73.98,13.02 71.75,10.79 71.12,10.79 C13.1 | 73.98,13.02 73.98,13.97 U$17.6 73.98,14.29 73.98,16.51 R33.1 | U$16.5 82.87,16.51 79.38,13.02 73.98,13.02
N$19
  Top 0.152: R33.2 75.88,16.51 75.88,14.29 U$17.4
N$20  (via drill 0.41)
  Top 0.152: U$19.6 73.98,5.4 73.98,7.62 R34.1 74.3,7.62 v74.3,8.89 | U$18.5 79.06,1.59 71.12,1.59 C15.1
  Bottom 0.152: v74.3,8.89 81.28,8.89 U$18.5
N$21
  Top 0.152: R34.2 75.88,7.62 75.88,5.4 U$19.4
N$22
  Top 0.152: 30.16,75.88 30.16,73.66 R35.1 | 30.16,75.88 33.02,73.03 C17.1 33.02,72.71 22.23,72.71 21.27,73.66 U$20.5 | 30.16,75.88 U$21.6
N$23
  Top 0.152: R35.2 28.26,73.66 28.26,75.88 U$21.4
N$24
  Top 0.152: 17.46,53.66 17.46,55.56 U$23.6 | 17.46,53.66 17.46,53.34 R36.1 | 17.46,53.66 20.32,53.66 C19.1 | 17.46,53.66 R36.1 | U$22.5 11.43,62.55 14.61,59.37 14.61,52.7 14.92,52.39 16.19,52.39 17.14,53.34 R36.1
N$25
  Top 0.152: R36.2 15.56,53.34 15.56,55.56 U$23.4
N$26  (via drill 0.41)
  Top 0.152: 26.35,53.66 26.35,55.56 U$25.6 | 26.35,53.66 26.35,53.34 R37.1 26.35,53.66 | 26.35,53.66 29.21,53.66 C21.1 29.21,53.98 v30.48,55.24
  Bottom 0.152: v30.48,55.24 U$24.5
N$27
  Top 0.152: R37.2 24.45,53.34 24.45,55.56 U$25.4
N$28  (via drill 0.41)
  Top 0.152: 63.18,53.02 63.18,50.8 R38.1 62.87,50.8 61.91,49.85 v60.33,49.85 | 63.18,53.02 66.04,53.02 C23.1 | 63.18,53.02 U$27.6
  Bottom 0.152: U$26.5 54.29,50.8 55.24,49.85 v60.33,49.85
N$29
  Top 0.152: R38.2 61.28,50.8 61.28,53.02 U$27.4
SCL  (via drill 0.41)
  Top 0.152: v40.01,19.68 ISO1540.6
  Bottom 0.152: v40.01,19.68 43.18,22.86 43.18,27.62 41.91,28.89 U$1.19
SCL_GLV
  Top 0.152: ISO1540.3 40.01,4.45 I2C.1
SDA  (via drill 0.41)
  Top 0.152: ISO1540.7 38.73,19.37 v40.64,21.27
  Bottom 0.152: v40.64,21.27 40.64,40.64 U$1.18
SDA_GLV
  Top 0.152: ISO1540.2 38.73,4.45 I2C.2
TS1
  Bottom 0.152: TEMP_SENSE.12 1.91,42.55 U$1.33
TS2
  Bottom 0.152: TEMP_SENSE.11 3.81,51.44 U$1.34
TS3
  Bottom 0.152: TEMP_SENSE.10 5.08,52.7 5.08,43.18 U$1.35
TS4
  Bottom 0.152: TEMP_SENSE.9 5.4,54.93 5.4,45.4 U$1.36
TS5
  Bottom 0.152: TEMP_SENSE.8 5.71,57.15 5.71,47.62 U$1.37
TS6
  Bottom 0.152: TEMP_SENSE.7 6.03,59.37 6.03,49.85 U$1.38
TS7
  Bottom 0.152: TEMP_SENSE.6 6.35,61.59 6.35,52.07 U$1.39
TS8
  Bottom 0.152: TEMP_SENSE.5 6.67,63.82 6.67,53.34 18.1,41.91 U$1.A21
TS9
  Bottom 0.152: TEMP_SENSE.4 6.99,66.04 6.99,53.66 17.46,43.18 20.32,43.18 U$1.A22
TS10  (via drill 0.41)
  Top 0.152: TEMP_SENSE.3 3.81,73.66 10.48,66.99 10.48,46.99 15.24,42.23 15.24,26.35 16.51,25.08 31.75,25.08 33.02,26.35 33.02,26.99 37.78,31.75 v48.26,31.75
  Bottom 0.152: U$1.DM v48.26,31.75
TS11  (via drill 0.41)
  Top 0.152: TEMP_SENSE.2 7.3,70.8 v7.62,70.8 | v7.62,53.98 7.62,32.07 12.7,26.99 12.7,26.35 14.29,24.77 41.27,24.77 41.91,25.4 42.23,25.4 43.18,26.35 43.18,26.99 44.13,27.94 46.04,27.94 47.31,29.21 U$1.DP
  Bottom 0.152: v7.62,53.98 v7.62,70.8
TS12  (via drill 0.41)
  Top 0.152: 49.TP 2.54,49.21 3.81,50.48 v3.81,72.71
  Bottom 0.152: v3.81,72.71 3.81,76.83 TEMP_SENSE.1
VS1
  Top 0.152: RBH1.1 RBL1.2 67.31,67.94 67.94,67.94 68.58,67.31 68.58,49.21 57.47,38.1 33.02,38.1 U$1.14
VS2  (via drill 0.41)
  Top 0.152: RBH2.1 RBL2.2 64.77,67.94 63.82,66.99 v63.5,66.99 | v63.5,65.72 63.5,59.37 59.37,55.24 59.37,43.18 58.42,42.23 58.42,41.59 57.47,40.64 33.02,40.64 U$1.15
  Bottom 0.152: v63.5,65.72 v63.5,66.99
VS3  (via drill 0.41)
  Top 0.152: RBH3.1 RBL3.2 62.23,67.94 60.96,67.94 60.33,67.31 v55.88,67.31 | v53.66,65.41 52.39,65.41 34.29,47.31 U$1.16
  Bottom 0.152: v55.88,67.31 53.98,65.41 v53.66,65.41
VS4  (via drill 0.41)
  Top 0.152: RBH4.1 RBL4.2 59.69,67.94 v58.42,67.94 | v55.24,64.77 52.39,64.77 36.83,49.21 U$1.17
  Bottom 0.152: v55.24,64.77 v58.42,67.94
VS5  (via drill 0.41)
  Top 0.152: RBH5.1 57.15,68.58 | v55.88,68.58 57.15,68.58 | v52.7,64.14 52.7,54.29 44.45,46.04 U$1.20 | 57.15,68.58 RBL5.2
  Bottom 0.152: v55.88,68.58 53.02,68.58 52.7,68.26 v52.7,64.14
VS6  (via drill 0.41)
  Top 0.152: RBH6.1 RBL6.2 54.61,67.94 v53.34,67.94 | v54.29,63.5 54.29,49.21 U$1.21
  Bottom 0.152: v53.34,67.94 53.34,66.04 53.02,65.72 53.02,64.77 v54.29,63.5
VS7  (via drill 0.41)
  Top 0.152: RBH7.1 RBL7.2 52.07,67.94 51.44,67.31 v48.26,67.31
  Bottom 0.152: v48.26,67.31 48.26,51.12 49.53,49.85 U$1.22
VS8  (via drill 0.41)
  Top 0.152: RBH8.1 RBL8.2 49.53,67.94 v50.8,67.94
  Bottom 0.152: v50.8,67.94 50.8,65.09 60.96,54.93 60.96,49.53 54.61,43.18 53.34,43.18 U$1.23
VS9  (via drill 0.41)
  Top 0.152: RBH9.1 RBL9.2 46.99,67.94 v45.72,67.94
  Bottom 0.152: v45.72,67.94 45.72,53.02 48.26,50.48 48.26,40.64 U$1.A10
VS10  (via drill 0.41)
  Top 0.152: RBH10.1 RBL10.2 44.45,67.94 v43.18,67.94
  Bottom 0.152: v43.18,67.94 43.18,54.93 46.67,51.44 46.67,43.18 45.72,42.23 45.72,40.64 U$1.A11
VS11  (via drill 0.41)
  Top 0.152: RBH11.1 RBL11.2 41.91,67.94 40.64,67.94 40.01,67.31 38.73,67.31 36.51,65.09 36.51,53.34 25.4,42.23 25.4,41.59 v23.5,39.69
  Bottom 0.152: v23.5,39.69 14.29,30.48 7.62,30.48 U$1.31
VS12  (via drill 0.41)
  Top 0.152: RBH12.1 RBL12.2 39.37,67.94 38.42,67.94 34.29,63.82 34.29,53.66 v24.13,43.5
  Bottom 0.152: v24.13,43.5 22.86,42.23 22.86,41.59 14.29,33.02 7.62,33.02 U$1.32